# Altium PCB glucometer_pcb.PcbDoc
Units mil, origin at the board's own origin, x right, y up, seen from the top; angles counter-clockwise.
Board outline 1350 x 1990 mil, 2 copper layers (Top Layer, Bottom Layer); 11 components, 13 nets, 74 pads, 0 vias.
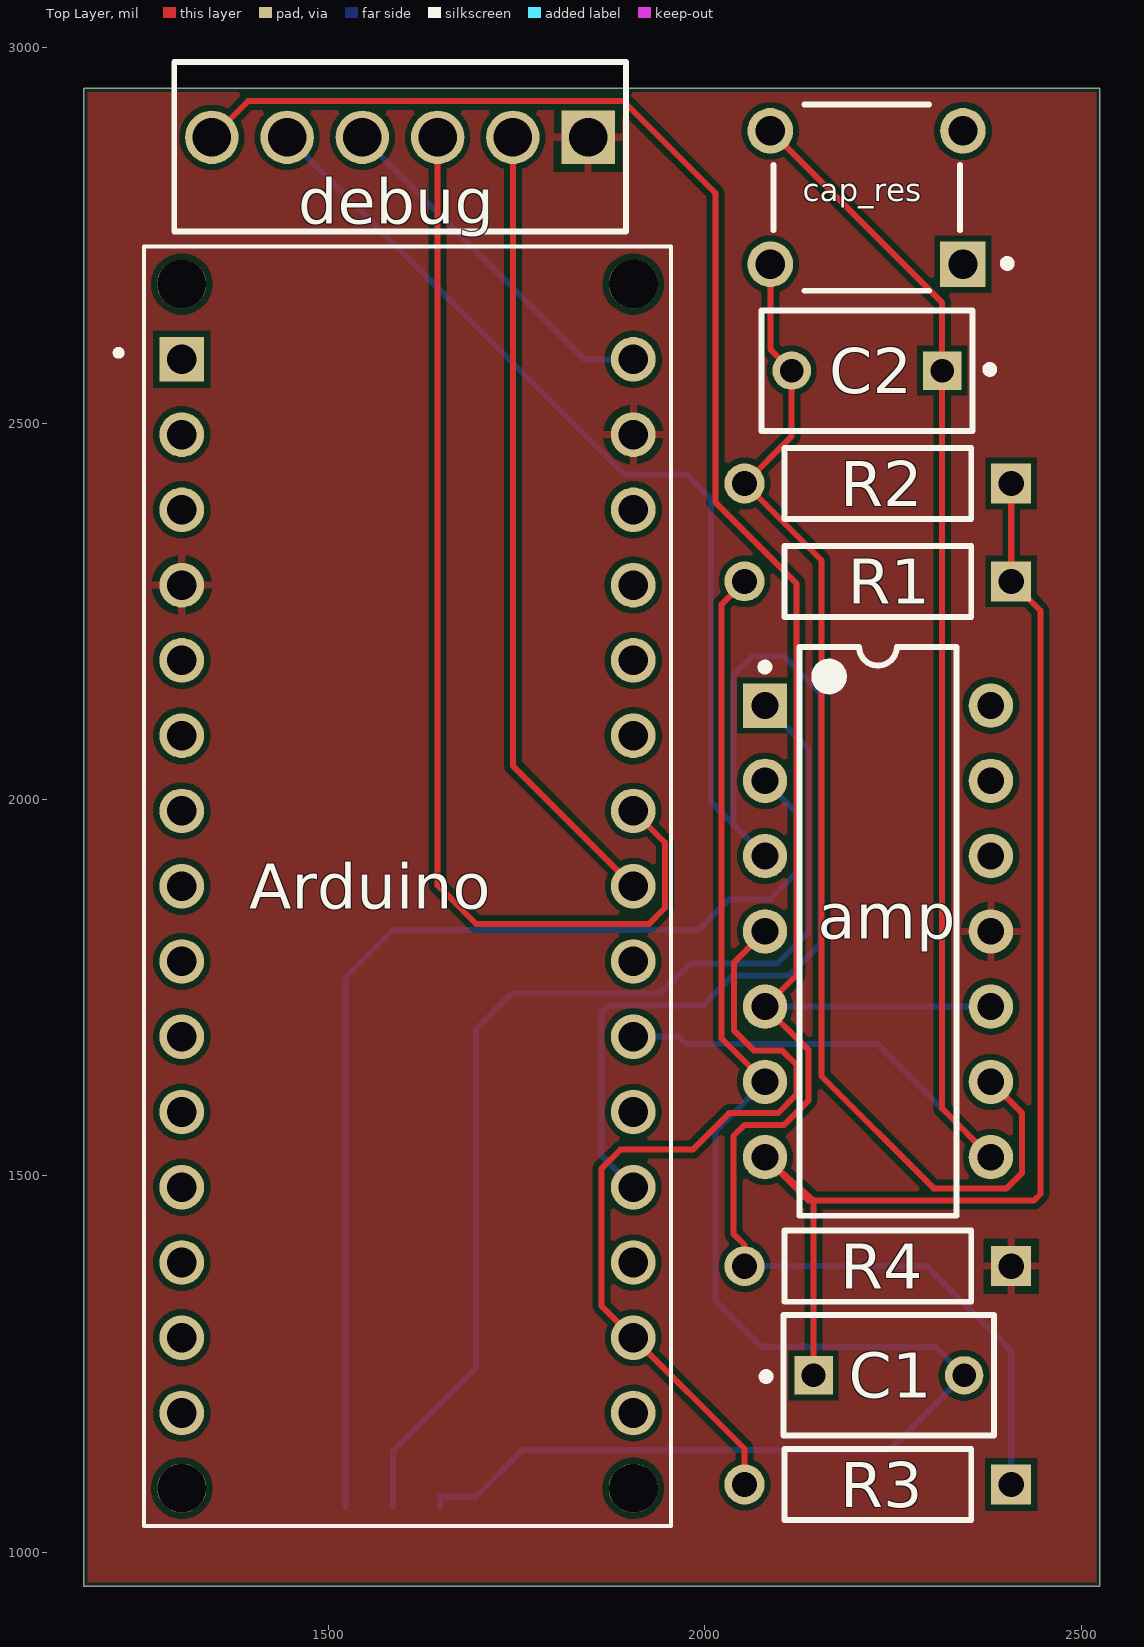
[diagram p0: Top Layer view]
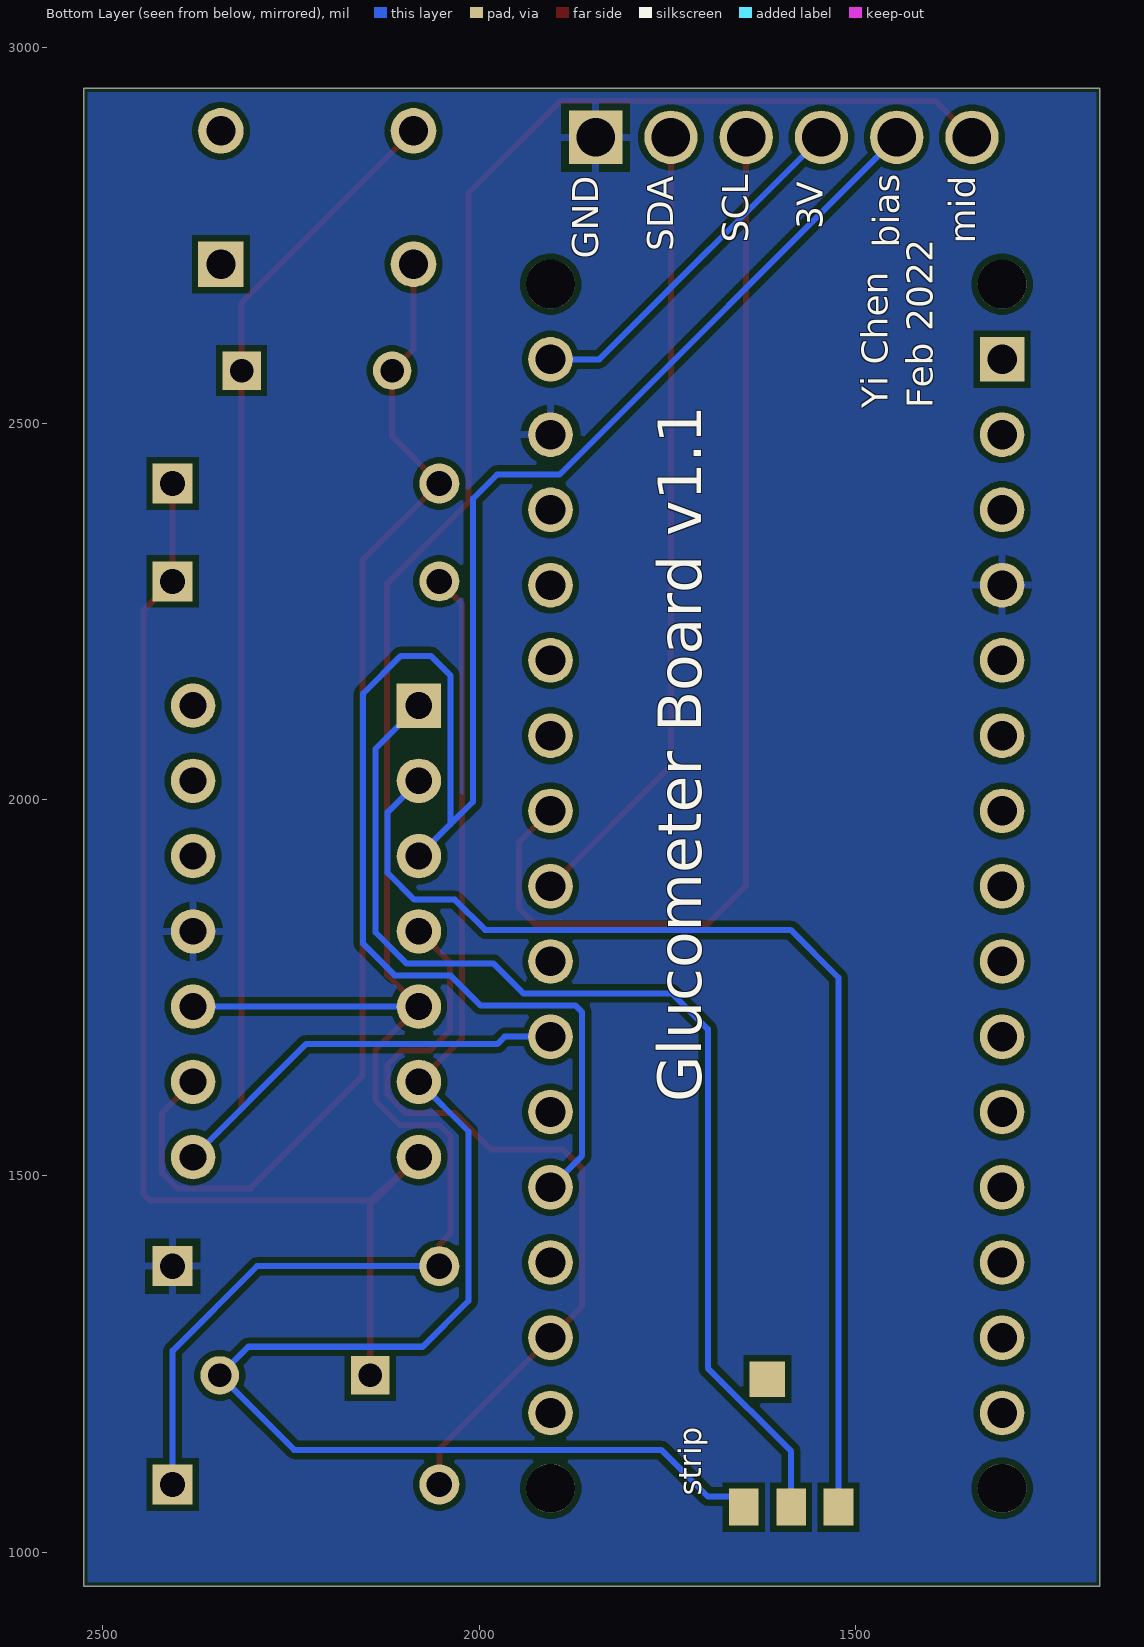
[diagram p1: Bottom Layer view, seen from below]

## Layer stack, top to bottom
Top Solder: solder mask 0.4, Solder Resist, Dk 3.5
Top Layer: signal copper 1.4
Dielectric 1: dielectric 12.6, FR-4, Dk 4.8
Bottom Layer: signal copper 1.4
Bottom Solder: solder mask 0.4, Solder Resist, Dk 3.5

## Board outline
2525,955 2525,2945 1175,2945 1175,955

## Design rules (kind name [scope] priority, off if disabled: settings)
Clearance [All] p1: gap=8 ignorepadtopadclearanceinfootprint=FALSE
PolygonConnect [All] p1: connectstyle=Relief reliefconductorwidth=10 reliefentries=4 polygonreliefangle="90 Angle" airgapwidth=10
RoutingVias [All] p1: holewidth=28 width=50 viastyle="Through Hole" minholewidth=28 minwidth=50 maxholewidth=28 maxwidth=50
SilkToSilkClearance [All] p1 off: silktosilkclearance=10
SilkToSolderMaskClearance [IsPad] p1 off: minsilkscreentomaskgap=10 clearancetoexposedcopper=TRUE
SolderMaskExpansion [All] p1: expansion=4 istentingtop=FALSE
Width [All] p1: maxlimit=8 minlimit=8 preferedwidth=8
28 further rules are at their usual default settings.

## Components (designator, comment, footprint, x,y, rotation, side; value= is the part's Value field where it differs from the comment)
amp "LMC6484IN/NOPB" NFF0014A 2230,1825 r0 top
Arduino "A000005" MODULE_A000005 1605,1885 r0 top
C1 "10nF" KEMT-C330C105M5U5TA 2244.53,1235 r0 top
C2 "100uF" KEMT-C330C105M5U5TA 2215.47,2570 r180 top
cap_res "3-1825910-1" FP-3-1825910-1-MFG 2215,2800 r180 top
debug "640456-6" TECO-640456-6_V 1845,2880 r180 top
R1 "100K" RESA60-630X240 2230,2290 r180 top
R2 "100K" RESA60-630X240 2230,2420 r180 top
R3 "220R" RESA60-630X240 2230,1090 r180 top
R4 "220R" RESA60-630X240 2230,1380 r180 top
strip "strip_connector" strip_connector 1479.08,1240.85 r0 bottom

## Footprints (in the part's own frame and the unit in brackets; to place one, negate y for a bottom-side part, rotate by r counter-clockwise, add the part's x,y. Pads: shape width x height; smd on the part's side, far side on the other; paste and mask are expansions set on the pad)
FP-3-1825910-1-MFG [mm]
  rect 1.54x1.54 hole 0.99 paste-1000 mask+0: 1(-3.25,2.25)
  round 1.54 hole 0.99 paste-1000 mask+0: 2(3.25,2.25) 3(-3.25,-2.25) 4(3.25,-2.25)
  silkscreen extent -4.87,-3.14 3.14,3.14, body extent -4.12,-3.24 4.12,3.24, height 0.25
KEMT-C330C105M5U5TA [mm] "THD, 2-Leads, Body 7.11x4.07mm"
  rect 1.3x1.3 hole 0.8: 1(-2.54,0)
  round 1.3 hole 0.8: 2(2.54,0)
  silkscreen extent -4.27,-2.03 3.55,2.03, body extent -3.55,-2.03 3.55,2.03, height 9.14
MODULE_A000005 [mm]
  rect 1.508x1.508 hole 1: 1(-7.62,17.78)
  round 1.508 hole 1: 2(-7.62,15.24) 3(-7.62,12.7) 4(-7.62,10.16) 5(-7.62,7.62) 6(-7.62,5.08) 7(-7.62,2.54) 8(-7.62,0) 9(-7.62,-2.54) 10(-7.62,-5.08) 11(-7.62,-7.62) 12(-7.62,-10.16) 13(-7.62,-12.7) 14(-7.62,-15.24) 15(-7.62,-17.78) 16(7.62,-17.78) 17(7.62,-15.24) 18(7.62,-12.7) 19(7.62,-10.16) 20(7.62,-7.62) 21(7.62,-5.08) 22(7.62,-2.54) 23(7.62,0) 24(7.62,2.54) 25(7.62,5.08) 26(7.62,7.62) 27(7.62,10.16) 28(7.62,12.7) 29(7.62,15.24) 30(7.62,17.78)
  round 1.651 hole 1.651 unplated: ""(-7.62,-20.32) ""(-7.62,20.32) ""(7.62,-20.32) ""(7.62,20.32)
  silkscreen extent -9.85,-21.59 8.89,21.59
NFF0014A [mm] "DIP, 14-Leads, Body 19.2x6.6mm, Pitch 2.54mm"
  rect 1.5x1.5 hole 0.9: 1(-3.81,7.62)
  round 1.5 hole 0.9: 2(-3.81,5.08) 3(-3.81,2.54) 4(-3.81,0) 5(-3.81,-2.54) 6(-3.81,-5.08) 7(-3.81,-7.62) 8(3.81,-7.62) 9(3.81,-5.08) 10(3.81,-2.54) 11(3.81,0) 12(3.81,2.54) 13(3.81,5.08) 14(3.81,7.62)
  silkscreen extent -3.93,-9.6 2.65,9.6, body extent -4.25,-9.52 4.25,9.53, height 4.08
RESA60-630X240 [mm] "Axial Resistor, 2-Leads, Dia 2.4mm, Body Length 6.3mm"
  rect 1.35x1.35 hole 0.85: 1(-4.5,0)
  round 1.35 hole 0.85: 2(4.5,0)
  silkscreen extent -3.15,-1.2 3.15,1.2, body extent -3.15,-1.2 3.15,1.2, height 2.4
strip_connector [mm]
  rect 1x1.25 smd: 0(4.3,4.594) 1(2.7,4.594) 2(1.1,4.594)
  rect 1.2x1.2 smd: 3(3.5,0.276)
TECO-640456-6_V [mm] "THD, 6-Leads, Body 15.24x5.72mm, Pitch 2.54mm"
  rect 1.8x1.8 hole 1.3: 1(0,0)
  round 1.8 hole 1.3: 2(2.54,0) 3(5.08,0) 4(7.62,0) 5(10.16,0) 6(12.7,0)
  silkscreen extent -1.27,-2.54 13.97,3.18, body extent -1.27,-2.54 13.97,3.18, height 10.03

## Part data
amp: library part CMP-0055-00188-3, "CMOS Quad Rail to Rail Input and Output Operational Amplifier, 14-pin MDIP, Pb-Free", Manufacturer="Texas Instruments", Package Reference=NFF0014A, PackageTopMarking=NSUZXYYTTE#*LMC6484IN, PowerWise=N, Code_JEDEC=MS-001-AA, ComponentLink1Description="Datasheet URL", ComponentLink1URL=http://www.ti.com/general/docs/lit/getliterature.tsp?genericPartNumber=LMC6484&fileType=pdf, CompType=Amplifiers, PackageDescription="MDIP, .750 x .250 x.130in, 14 Lead, .100in Pitch", PinCount=14, RoHS=Y
Arduino: "CLOCK SAW OSCILLATOR SEAM7050 T&", Package=None, Digi-Key_Part_Number=SPA000005J-ND, Digi-Key_Purchase_URL=https://www.digikey.com/product-detail/en/diodes-incorporated/SPA000005J/SPA000005J-ND/9769570?utm_source=snapeda&utm_medium=aggregator&utm_campaign=symbol, MF=Arduino, MP=A000005, SnapEDA_Link=https://www.snapeda.com/parts/A000005/Arduino/view-part/51027/?ref=snap
C1 C2: library part CMP-2000-06056-1, "Ceramic Capacitor, 1 uF, +/- 20%, 50 V, -10 to 85 degC, 2-Pin THD, RoHS, Bulk", Capacitance=1µF, Manufacturer=Kemet, Operating Temperature=10°C~85°C, Package / Case=Radial, Package Description="2-Pin Through Hole Device, Body 7.11 x 4.07 mm", Package Reference=C330C105M5U5TA, Ratings=-, Standard Package=250, Temperature Coefficient=Z5U, Tolerance=±20%, Voltage - Rated=50V, Applications=GeneralPurpose, Catalog Drawings=C330(std), Category=Capacitors, Datasheet URL=http://www.kemet.com/Lists/ProductCatalog/Attachments/599/KEM_C1051_GOLDMAX_Z5U.pdf, Datasheet Version=12/2015, Family=CeramicCapacitors, Features=-, Height - Seated (Max)="0.360\"(9.14mm)", Lead Spacing="0.200\"(5.08mm)", Lead Style=Straight, Manufacturer URL=http://www.kemet.com/, Mounting Technology=ThroughHole, Mounting Type=ThroughHole, Online Catalog=GoldenMax™Series, Other Names=399-4390, Packaging=Bulk, PCN Design/Specification=C3yySeriesGoldenMaxLeadConfiguration02/Feb/2015, Product Training Modules=CapacitorBasics-TypicalUsesforCapacitors, Series=GoldenMax™, Size / Dimension="0.300\"Lx0.150\"W(7.62mmx3.81mm)", Thickness (Max)=-
cap_res: library part CMP-03407-000001-1, "SWITCH TACTILE SPST-NO 0.05A 24V", Contact Current Rating=50mA, Contact Resistance=100mΩ, Manufacturer="TE Connectivity", Operating Force=160gf, Package=0, Temperature="-35°C to +85°C", Temperature Range High=+85°C, Temperature Range Low=-35°C, Automotive=No, Category=Switch, ComponentLink2Description=Datasheet, ComponentLink2URL=https://www.te.com/commerce/DocumentDelivery/DDEController?Action=srchrtrv&DocNm=1825910&DocType=Customer+Drawing&DocLang=English, Device Class L1=Electromechanical, Device Class L2=Switches, Device Class L3="Tactile Switches", Digikey Description="SWITCH TACTILE SPST-NO 0.05A 24V", Electromechanical Life=100000Cycles, Height=17.3mm, Lead Free=Yes, Manufacturer Part Number=3-1825910-1, Mount="Through Hole", Octopart=https://octopart.com/3-1825910-1-te+connectivity-46506874, RoHS=TRUE, Throw Configuration=SPST-NO
debug: library part CMP-2000-05661-1, "Male Header, Pitch 2.54 mm, 1 x 6 Position, Height 10.03 mm, Tail Length 3.56 mm, -55 to 105 degC, Bulk", Color=White, Current, Rating="5 /  / A", Flammability Rating=UL94V-0, Manufacturer="TE Connectivity", Package Description="Male Header, Pitch 2.54 mm, 1 x 6 Position, Height 10.03 mm, Tail Length 3.56 mm", Temperature, Operating="-55to+105 /  / °C", Voltage, Rating="250 /  / V", Agency Approvals=CSA,UL, Angle=Straight, Brand/Series=MTA-100Series, Color, Housing=White, Connector Type=MTA-100, Contact Centerline Spacing="0.100 /  / in.", Contact Mating Area Plating=Tin, Contact Plating=Tin, Contact Shape=Square, Contact Termination Area Plating=Tin, Datasheet URL=https://datasheet.ciiva.com/25618/0900766b80eb7fdd-25618163.pdf, Datasheet Version="Rev. W, 05/2005", Length, Overall="0.6 /  / \"", Length, Pin="0.14 /  / \"", Length, Terminal Post="0.14 /  / in.", Manufacturer URL=http://www.te.com/, Material, Contact=CopperAlloy, Material, Housing=Polyester, Mount Angle=Vertical, Mounting Hole Size="0.04 /  / \"", Mounting Technology=ThroughHole, Mounting Type=PCMount, Number of Contacts=6, Number of Positions=6, Number of Rows=1, Package Reference=640456-6, Pin Spacing="0.1 /  / \"", Primary Type=InterconnectSystem, Size, Post="0.025 /  / in.", Special Features=Pinstrip, Standards=RoHSCompliant,ELVCompliant,UL94V-0, Termination=Solder, Type=PCBPlug
R1 R2 R3 R4: library part CMP-1659-00065-1, "Axial Resistor, 2.21 KOhm, +/- 1%, 0.25 W, -55 to 155 degC, 2-Pin THD, RoHS, Bulk", Case Code (Imperial)=0402, Case Code (Metric)=1005, Current Rating="300 mA", Max Operating Temperature="125 degC", Min Operating Temperature="-55 degC", Package Quantity=10000, Resistance="0.15 Ohm", Case\Package=0402, ComponentLink1Description="Manufacturer URL", ComponentLink1URL=http://www.yageo.com/, ComponentLink2Description=Datasheet, ComponentLink2URL=http://www.yageo.com/documents/recent/Yageo%20LR_MFR_2013.pdf, DatasheetVersion=Apr-13, Height="0.02 inch", Length="0.04 inch", Mount="Surface Mount", PackageDescription="2-Pin Axial Lead, Dia 2.4 mm, Body Length 6.3 mm", PackageReference=MFR-25, Packaging="Tape and Reel", Pins=2, Radiation Hardening=No, REACH SVHC="No SVHC", RoHSCompliant=true, Shielding=Unshielded, Width="0.02 inch"

## Nets (pads, with @x,y where several pads share a name; then routed paths per layer and width w, separated by ;. In a path a pad name is that pad's centre, name@x,y a point inside that pad or via, vN(x,y) a via of type N, cw(c..) or ccw(c..) an arc to the next point about the centre after c; other vN are vias at no path point)
3V3: amp.4 Arduino.17 R3.2 | length 1088.5
  Top Layer w8: R3.2 2052.83,1137.17 Arduino.17 1863,1327 1863,1510 1888,1535 1984,1535 2032.47,1583.47 2097.2,1583.47 2121.53,1607.8 2121.53,1648 2103,1666.53 2065.47,1666.53 2038.47,1693.53 2038.47,1783.47 amp.4
3V_in: Arduino.30 debug.4 | length 482.2
  Bottom Layer w8: debug.4 1840,2585 Arduino.30
ADC: amp.8 Arduino.21 C2.1 cap_res.4 | length 2026.2
  Top Layer w8: cap_res.4 2315.47,2660.16 C2.1 2315.47,1589.53 amp.8
  Bottom Layer w8: Arduino.21 1966,1685 1976,1675 2230,1675 amp.8
BIAS: amp.3 Arduino.19 debug.5 | length 2523.3
  Bottom Layer w8: debug.5 1893,2432 1976,2432 2008,2400 2008,1997 2038,1967 ; Arduino.19 1863,1527 1863,1717.69 1872,1726.69 1998.16,1726.69 2038,1766.53 2112,1766.53 2154,1808.53 2154,2141 2104,2191 2064,2191 2038,2165 2038,1967 ; amp.3 2038,1967
electrode_counter: amp.1 strip.1 | length 1500.9
  Bottom Layer w8: strip.1 1585.38,1134 1696,1244.62 1696,1695 1743.69,1742.69 1941,1742.69 1980.84,1782.53 2096.53,1782.53 2137.53,1823.53 2137.53,2067.47 amp.1
electrode_ref: amp.2 strip.2 | length 1499.8
  Bottom Layer w8: strip.2 1522.39,1763.39 1586,1827 1992,1827 2032,1867 2086,1867 2121.53,1902.53 2121.53,1983.47 amp.2
electrode_working: amp.6 C1.2 R1.2 strip.0 | length 2168.1
  Top Layer w8: R1.2 2022.47,2259.64 2022.47,1682.53 amp.6
  Bottom Layer w8: strip.0 1648.38,1074 1696,1074 1758,1136 2245.53,1136 C1.2 2306.53,1273 2075,1273 2014,1334 2014,1559 amp.6
GND: amp.11 Arduino.4 Arduino.29 debug.1 R4.1
mid_voltage: amp.5 amp.10 debug.6 R3.1 R4.2 | length 3208.1
  Top Layer w8: debug.6 1393,2928 1892,2928 2014,2806 2014,2395 2122,2287 2122,1767 amp.5 2137.53,1667.47 2137.53,1600 2105,1567.47 2052.47,1567.47 2038,1553 2038,1423 2052.83,1408.17 R4.2
  Bottom Layer w8: R4.2 2295,1380 2407.17,1267.83 R3.1 ; amp.5 amp.10
Netamp_7: amp.7 C1.1 R1.1 R2.1 | length 1672.4
  Top Layer w8: C1.1 2144.53,1467.47 ; R2.1 R1.1 2446,2251.17 2446,1475.94 2437.53,1467.47 2144.53,1467.47 ; 2144.53,1467.47 2137.53,1467.47 amp.7 2144.53,1467.47
Netamp_9: amp.9 C2.2 cap_res.2 R2.2 | length 1633.9
  Top Layer w8: cap_res.2 2087.05,2598.42 C2.2 2115.47,2482.64 R2.2 2155,2317.83 2155,1632.47 2304,1483.47 2401,1483.47 2421.53,1504 2421.53,1583.47 amp.9
SCL: Arduino.24 debug.3 | length 1472.2
  Top Layer w8: debug.3 1645,1886 1696,1835 1926,1835 1947,1856 1947,1943 Arduino.24
SDA: Arduino.23 debug.2 | length 1061.3
  Top Layer w8: debug.2 1745,2045 Arduino.23
pads on no net: amp.12 amp.13 amp.14 Arduino. Arduino.1 Arduino.2 Arduino.3 Arduino.5 Arduino.6 Arduino.7 Arduino.8 Arduino.9 Arduino.10 Arduino.11 Arduino.12 Arduino.13 Arduino.14 Arduino.15 Arduino.16 Arduino.18 Arduino.20 Arduino.22 Arduino.25 Arduino.26 Arduino.27 Arduino.28 cap_res.1 cap_res.3 strip.3

## Polygon pours and split planes (outlines as drawn)
GND on Top Layer "GND_L01_P001" (solid, pour order 1): 1180,2940 2520,2940 2520,960 1180,960
GND on Bottom Layer "GND_L02_P002" (solid, pour order 2): 1180,2940 2520,2940 2520,960 1180,960

## Silkscreen, mask and mechanical layers (free items; w line width, h text height)
Bottom Overlay:
  text "3V" at 1531.2,2757.87 h60 r270
  text "SCL" at 1630.63,2740 h60 r270
  text "mid" at 1328.57,2738.28 h60 r270
  text "bias" at 1429.83,2733.12 h60 r270
  text "SDA" at 1730.06,2728.68 h60 r270
  text "GND" at 1829.49,2718.8 h60 r270
  text "Yi Chen / Feb 2022" at 1385,2520 h60 r270
  text "Glucometer Board v1.1" at 1685.74,1598.16 h100 r270
  text "This board acts as a development board for a transimpedance based glucometer, powered by an Arduino Nano." at 1470,1330 h80 r270
Mechanical 1:
  the board outline again, w10